# Altium PCB AU0004A.PcbDoc
Units mil, origin at the board's own origin, x right, y up, seen from the top; angles counter-clockwise.
Board outline 1033.51 x 1302.59 mil, 2 copper layers (Top Layer, Bottom Layer), stack 61.7 mil thick; 4 components, 4 nets, 15 pads, 3 vias.
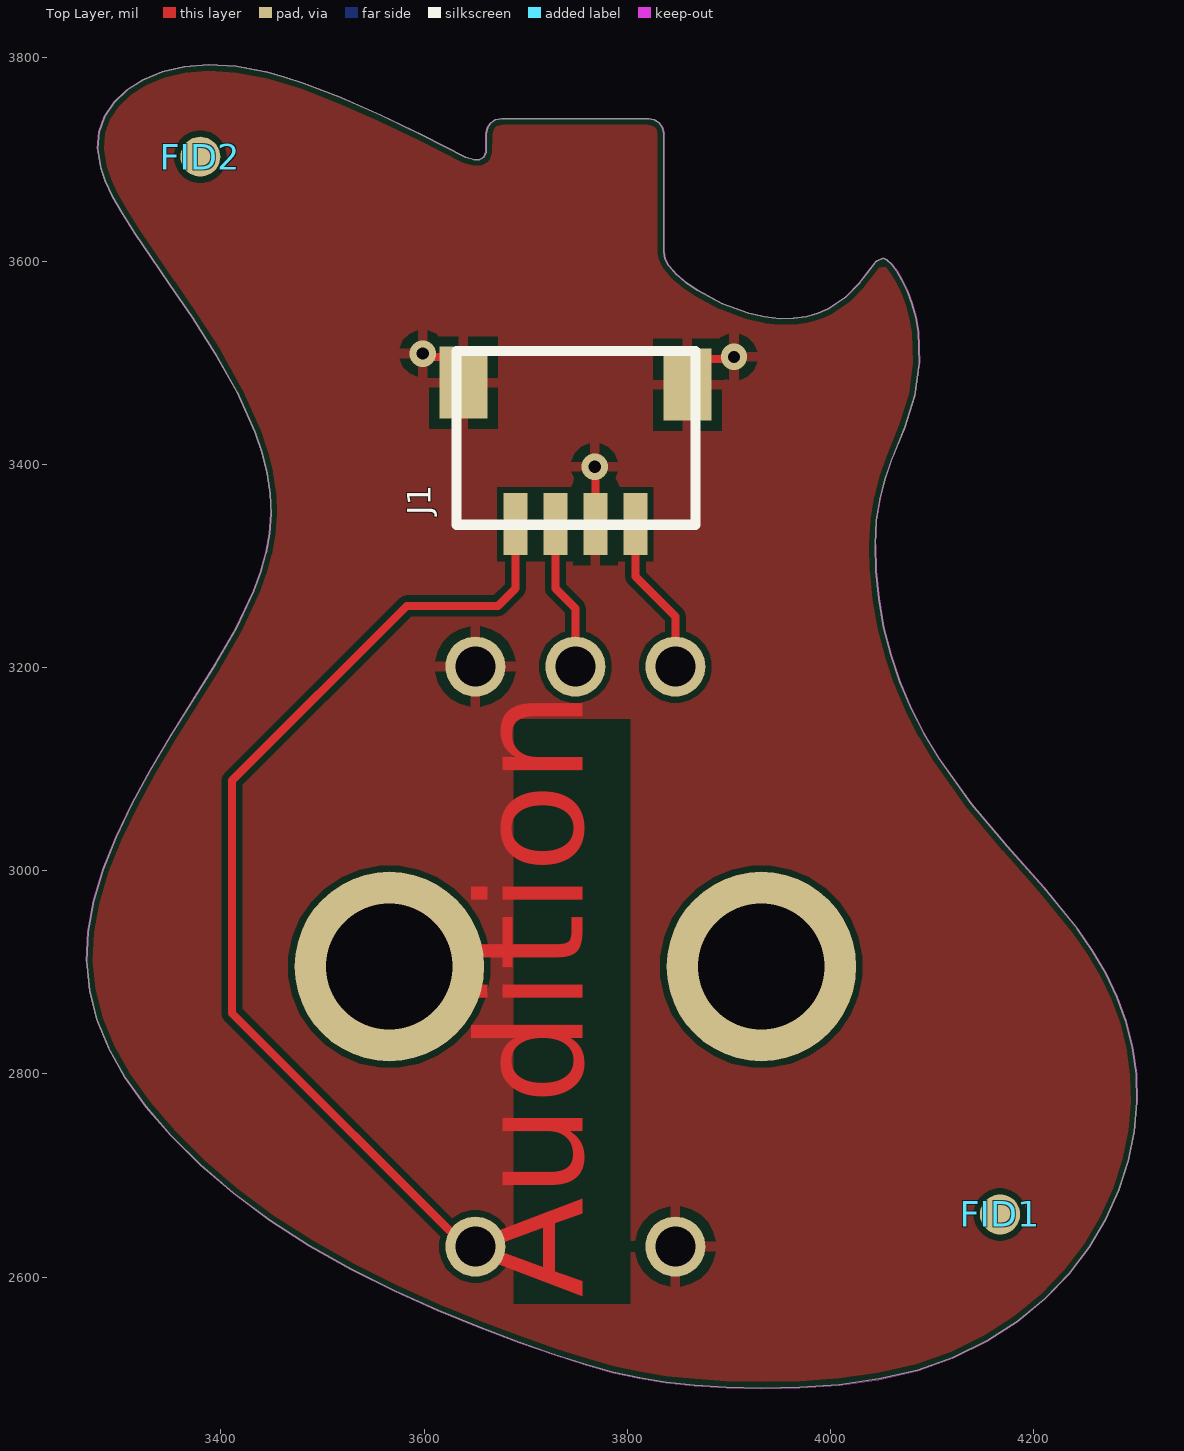
[diagram p0: Top Layer view]
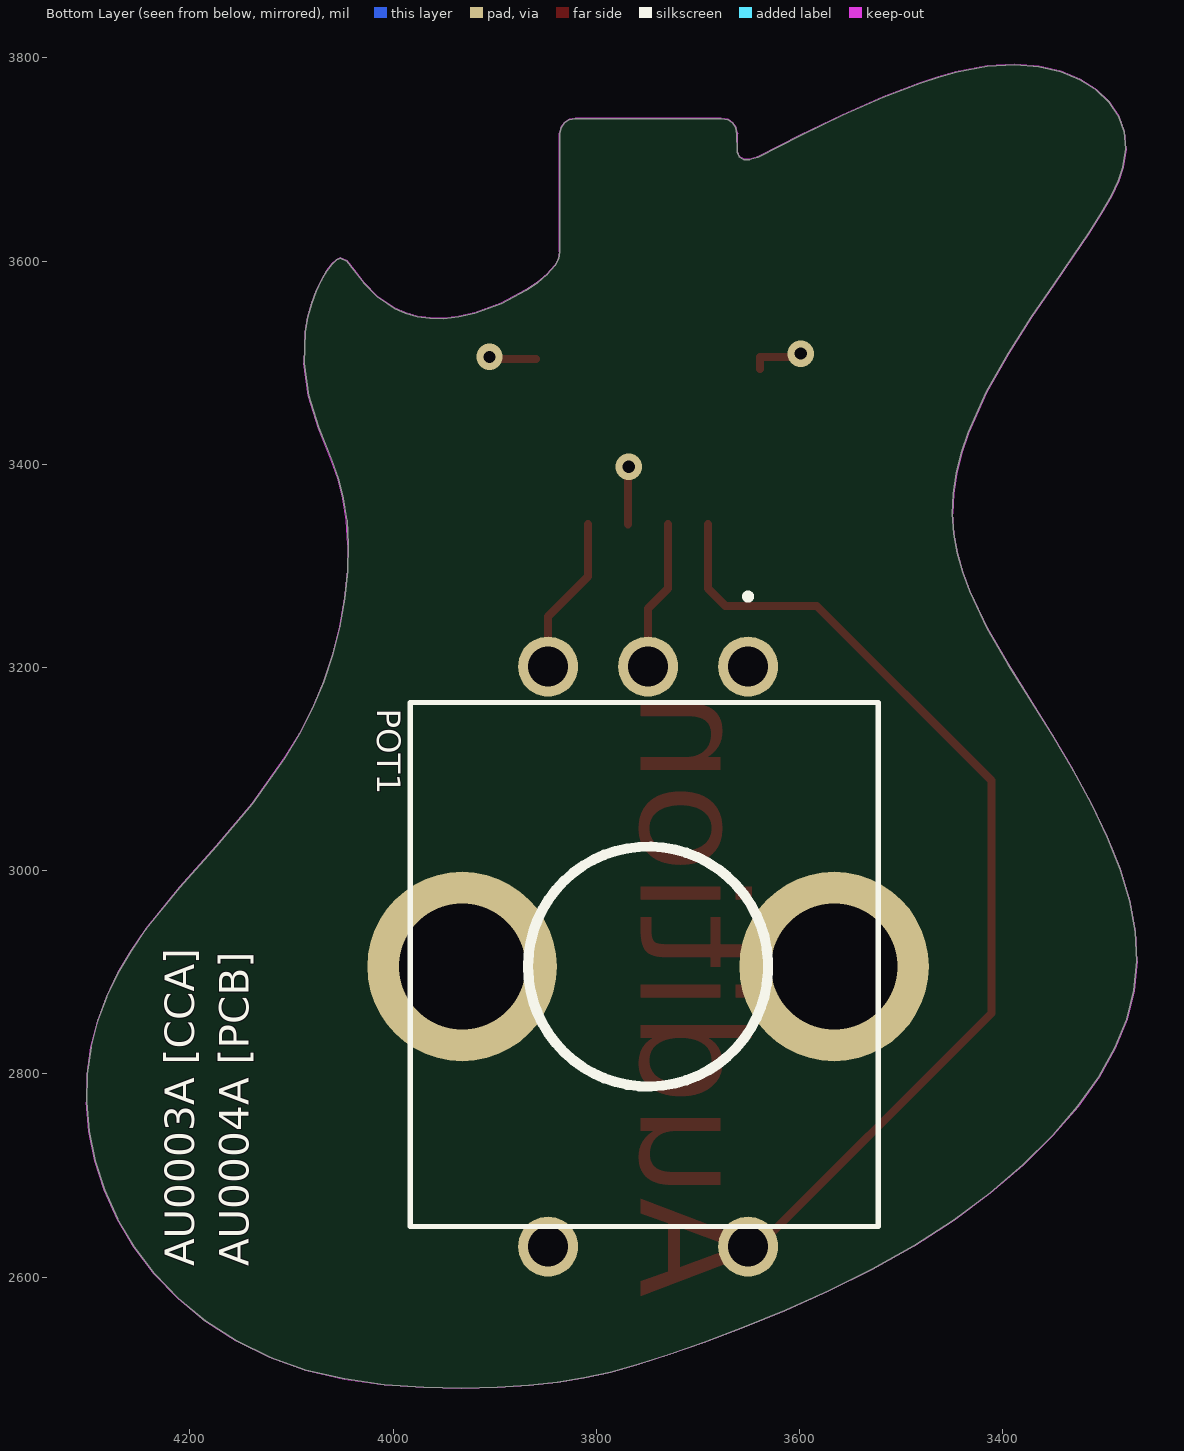
[diagram p1: Bottom Layer view, seen from below]

## Layer stack, top to bottom
Top Solder: solder mask 0.4, Solder Resist, Dk 3.5
Top Layer: signal copper 1.4
Dielectric 1: dielectric 58.9, FR-4, Dk 4.8
Bottom Layer: signal copper 1.4
Bottom Solder: solder mask 0.4, Solder Resist, Dk 3.5

## Board outline
3277.97,2853.79 3270.83,2882.12 3267.99,2910.76 3269.35,2939.97 3274.8,2970.01 3284.13,3001.02 3296.88,3032.92 3312.59,3065.63 3330.76,3099.04 3350.92,3133.07 3394.59,3202.71 3394.61,3202.74 3415.16,3238.47 3415.18,3238.51 3432.41,3275.04 3432.43,3275.09 3439.21,3293.68 3439.22,3293.73 3444.47,3312.58 3444.48,3312.63 3447.97,3331.73 3447.98,3331.79 3449.47,3351.19 3449.47,3351.25 3448.73,3370.93 3448.72,3370.99 3445.7,3390.95 3445.69,3391 3440.62,3411.09 3440.61,3411.13 3433.79,3431.24 3433.77,3431.29 3415.99,3471 3415.96,3471.05 3394.55,3509.24 3394.53,3509.27 3371.75,3544.88 3371.74,3544.9 3349.85,3576.89 3349.84,3576.9 3330.89,3604.38 3315.3,3627.59 3302.84,3647.26 3293.26,3664.11 3286.32,3678.86 3281.77,3692.25 3278.98,3710.42 3280.44,3727.18 3285.89,3742.48 3295.09,3756.24 3307.81,3768.36 3323.75,3778.49 3342.62,3786.28 3364.15,3791.34 3388.18,3793.29 3415.24,3791.61 3446.02,3785.78 3462.99,3781.13 3481.15,3775.25 3517.51,3761.25 3557,3743.8 3598.54,3723.85 3641.01,3702.33 3641.11,3702.29 3649,3699.97 3649.16,3699.95 3655.03,3699.99 3659.36,3702.72 3661.17,3707.47 3661.21,3707.66 3661.47,3725.14 3662.64,3731.42 3665.82,3735.98 3670.5,3739.03 3677.06,3740.15 3820.86,3740.16 3826.6,3739.05 3831.33,3736.01 3834.54,3731.44 3835.73,3725.7 3835.72,3609.39 3835.74,3609.28 3837.11,3602.29 3837.16,3602.14 3840.49,3595.87 3840.56,3595.77 3848.35,3586.85 3848.41,3586.78 3857.91,3578.79 3857.95,3578.76 3868.9,3571.23 3868.96,3571.2 3893.51,3558.17 3893.58,3558.14 3919.6,3548.63 3919.67,3548.61 3935.3,3545.08 3935.37,3545.07 3949.98,3543.44 3950.05,3543.44 3963.63,3543.56 3963.69,3543.57 3976.19,3545.28 3976.27,3545.3 3987.66,3548.45 3987.73,3548.48 3998,3552.91 3998.09,3552.96 4015.32,3564.7 4015.4,3564.76 4028.61,3578.21 4028.65,3578.26 4038.33,3590.88 4045.43,3599.94 4051.89,3602.74 4055.52,3601.13 4060.02,3596.92 4065.1,3590.21 4070.37,3581.32 4075.48,3570.57 4080.06,3558.28 4083.76,3544.75 4086.26,3530.3 4087.36,3499.48 4083.01,3467.61 4073.1,3436.25 4060.1,3403.99 4060.09,3403.97 4053.93,3386.26 4053.92,3386.22 4048.8,3366.78 4048.78,3366.73 4045.31,3345.05 4045.3,3344.99 4043.89,3320.93 4043.88,3320.88 4044.56,3295.01 4044.56,3294.96 4047.33,3267.89 4047.34,3267.85 4052.2,3240.2 4052.21,3240.16 4059.17,3212.59 4059.18,3212.54 4068.23,3185.65 4068.25,3185.6 4079.28,3159.71 4079.3,3159.67 4092.08,3134.76 4092.1,3134.74 4106.4,3110.79 4106.43,3110.75 4138.63,3065.61 4138.67,3065.57 4174.01,3023.72 4174.03,3023.7 4209.83,2983.43 4243.08,2942.5 4257.82,2921.11 4270.88,2898.87 4281.99,2875.7 4290.88,2851.51 4297.27,2826.21 4300.9,2799.72 4301.5,2772.04 4298.95,2743.51 4293.12,2714.56 4283.89,2685.63 4271.14,2657.15 4254.76,2629.56 4234.71,2603.3 4211.16,2578.84 4184.28,2556.66 4154.26,2537.22 4121.3,2521 4085.59,2508.48 4047.7,2499.71 4008.77,2494.19 3969.98,2491.36 3932.51,2490.69 3897.55,2491.62 3866.2,2493.61 3838.2,2496.58 3811.98,2500.79 3785.98,2506.54 3758.62,2514.12 3728.32,2523.83 3693.68,2535.93 3655.07,2550.46 3613.79,2567.31 3571.17,2586.4 3528.52,2607.62 3487.15,2630.89 3448.26,2656.05 3412.39,2682.79 3379.85,2710.67 3350.98,2739.28 3326.09,2768.21 3305.52,2797.05 3289.5,2825.52

## Design rules (kind name [scope] priority, off if disabled: settings)
Clearance [All] p1: gap=6 ignorepadtopadclearanceinfootprint=FALSE
Height [All] p1: minheight=0 maxheight=3000 prefheight=500
PolygonConnect [All] p1: connectstyle=Relief reliefconductorwidth=10 reliefentries=4 polygonreliefangle="90 Angle" airgapwidth=10
RoutingVias [All] p1: holewidth=12 width=26 viastyle="Through Hole" minholewidth=10 minwidth=20 maxholewidth=50 maxwidth=50
SolderMaskExpansion [All] p1: expansion=4 istentingtop=FALSE
Width [All] p1: maxlimit=100 minlimit=6 preferedwidth=6
29 further rules are at their usual default settings.

## Components (designator, comment, footprint, x,y, rotation, side; value= is the part's Value field where it differs from the comment)
FID1 "PCB Fiducial" "Fiducial 1mm - 2mm" 4166.96,2661.67 r0 top
FID2 "PCB Fiducial" "Fiducial 1mm - 2mm" 3379.85,3702.72 r0 top
J1 "SM04B-SRSS-TB(LF)(SN)" SM04B-SRSS-TB(LF)(SN) 3748.96,3410.67 r180 top (schematic designator J2)
POT1 "PRS11R-425F-S103B1" PRS11R425FS103B1 3748.96,2905.67 r0 bottom

## Footprints (in the part's own frame and the unit in brackets; to place one, negate y for a bottom-side part, rotate by r counter-clockwise, add the part's x,y. Pads: shape width x height; smd on the part's side, far side on the other; paste and mask are expansions set on the pad)
"Fiducial 1mm - 2mm" [mm] "1mm Pad 2mm Opening"
  round 1 smd paste-10 mask+0.5: 1(0,0)
PRS11R425FS103B1 [mm]
  round 1.5 hole 1: 1(-2.5,-7.5) 2(0,-7.5) 3(2.5,-7.5) 4(-2.5,7) 5(2.5,7)
  round 4.74 hole 3.16: MH1(-4.65,0) MH2(4.65,0)
  silkscreen extent -5.75,-9.3 5.95,6.49, body extent -5.75,-6.61 5.95,6.49, height 31.8
SM04B-SRSS-TB(LF)(SN) [mm] "CONN HEADR SH 4POS SIDE 1MM TIN"
  rect 0.6x1.55 smd: 1(-1.5,1.769) 2(-0.5,1.769) 3(0.5,1.769) 4(1.5,1.769)
  rect 1.2x1.8 smd: M1(2.8,-1.769) M2(-2.8,-1.719)
  silkscreen extent -3,-2.56 2.97,1.78, body extent -3,-2.65 3,2.3, height 2.91

## Part data
FID1 FID2: library part Fiducial
J1: "Conn Shrouded Header HDR 4 POS 1mm Solder RA SMD T/R", Colour=Natural, Contact Resistance=40mR, Housing Colour=Beige, Manufacturer=JST, Max Current Rating=1A, Max Operating Temperature=85°C, Max Voltage Rating (AC)=50V, Min Operating Temperature=-25°C, Supplier Part Number 1=455-1804-1-ND, ComponentLink1Description=https://datasheet.ciiva.com/26894/getdatasheetpartid-499363-26894945.pdf, ComponentLink1URL=https://datasheet.ciiva.com/26894/getdatasheetpartid-499363-26894945.pdf, ComponentLink2Description=https://datasheet.ciiva.com/26894/getdatasheetpartid-640736-26894676.pdf, ComponentLink2URL=https://datasheet.ciiva.com/26894/getdatasheetpartid-640736-26894676.pdf, ComponentLink3Description=https://datasheet.ciiva.com/16487/jstsm04b-srss-tb-lf-sn-16487222.pdf, ComponentLink3URL=https://datasheet.ciiva.com/16487/jstsm04b-srss-tb-lf-sn-16487222.pdf, Connector Type="Male Pin", Contact Material="Copper Alloy", Contact Plating=Copper,Tin, Depth=4.95mm, Housing Material=Polyamide, Lead Free="Lead Free", Length=6mm, Manufacturer Part Number=SM04B-SRSS-TB(LF)(SN), Max Voltage Rating (DC)=50V, Mount="Surface Mount", Number of Contacts=4, Number of Positions=4, Number of Rows=1, Orientation="Right Angle", Packaging="Tape and Reel", Pitch=0.039inch, Pricing 1="1=0.61, 10=0.569, 100=0.436, 500=0.37914, 1000=0.31279 (USD)", Stock 1=43886, Supplier 1=Digi-Key, Termination=Solder
POT1: "10k Pot w/ Momentary Switch - 25mm Length", Manufacturer=Bourns, Supplier Part Number 1=652-PRS11R425FS103B1, Manufacturer Part Number=PRS11R-425F-S103B1, Pricing="1=3.76000, 10=3.30000, 50=3.30000, 100=2.70000, 1000=1.82000, 10000=1.70000 (USD)", RoHS=No, Stock 1=729, Supplier 1=Mouser

## Via types
v1: diameter 26, hole 12, Top Layer to Bottom Layer, tented both sides, 3 vias

## Nets (pads, with @x,y where several pads share a name; then routed paths per layer and width w, separated by ;. In a path a pad name is that pad's centre, name@x,y a point inside that pad or via, vN(x,y) a via of type N, cw(c..) or ccw(c..) an arc to the next point about the centre after c; other vN are vias at no path point)
+POT: J1.1 POT1.3 | length 166.4
  Top Layer w8: J1.1 3808.02,3289.61 3847.39,3250.24 POT1.3@3847.39,3190.94
GND: J1.2 J1.M1 J1.M2 POT1.1 POT1.5 | length 156.7
  Top Layer w8: v1(3598.76,3508.99) 3602.04,3505.71 3638.72,3505.71 J1.M1@3638.72,3493.9 ; v1(3767.96,3397.67) 3768.65,3396.98 J1.2 ; J1.M2@3859.2,3503.74 3903.09,3503.74 v1(3905.06,3505.71)
POT: J1.3 POT1.2 | length 158.2
  Top Layer w8: J1.3 3729.28,3277.71 3748.96,3258.02 POT1.2@3748.96,3190.94
SW: J1.4 POT1.4 | length 988.5
  Top Layer w8: POT1.4@3650.54,2620.08 3410.96,2859.65 3410.96,3088.67 3582.96,3260.67 3672.96,3260.67 3689.91,3277.61 J1.4
pads on no net: FID1.1 FID2.1 POT1.MH1 POT1.MH2

## Polygon pours and split planes (outlines as drawn)
GND on Top Layer "GND_L01_P000" (solid, remove dead copper, pour order 0): 4909.25,4072.24 4909.25,2105.24 2730.25,2105.24 2730.25,4072.24

## Keep-outs
Keep-Out Layer:
  lines w1: 3660.96,3725.19 3660.95,3725.75 3660.96,3725.19 ; 3660.96,3725.19 3662.15,3731.62 3665.45,3736.36 3670.31,3739.52 3677.02,3740.67 3820.9,3740.67 3826.8,3739.54 3831.69,3736.38 3835.02,3731.64 3836.24,3725.75 3836.24,3609.39 3837.62,3602.38 3840.95,3596.11 3848.74,3587.18 3858.24,3579.18 3869.19,3571.65 3893.75,3558.62 3919.78,3549.12 3935.42,3545.58 3950.05,3543.95 3963.62,3544.08 3976.13,3545.8 3987.53,3548.95 3997.8,3553.39 4015.03,3565.12 4028.24,3578.57 4037.92,3591.2 4045.11,3600.36 4051.89,3603.3 4055.81,3601.56 4060.4,3597.26 4065.52,3590.49 4070.83,3581.56 4075.95,3570.77 4080.55,3558.44 4084.26,3544.87 4086.78,3530.36 4087.87,3499.46 4083.52,3467.5 4073.59,3436.07 4060.58,3403.8 4054.42,3386.09 4049.29,3366.65 4045.82,3344.96 4044.4,3320.9 4045.08,3295.01 4047.85,3267.94 4052.71,3240.29 4059.67,3212.71 4068.72,3185.81 4079.75,3159.91 4092.54,3135 4106.84,3111.05 4139.06,3065.9 4174.41,3024.04 4210.22,2983.76 4243.49,2942.81 4258.25,2921.39 4271.33,2899.11 4282.47,2875.9 4291.37,2851.66 4297.78,2826.31 4301.41,2799.76 4302.02,2772.02 4299.46,2743.43 4293.62,2714.43 4284.37,2685.44 4271.6,2656.92 4255.19,2629.27 4235.1,2602.97 4211.51,2578.46 4184.58,2556.24 4154.52,2536.77 4121.5,2520.53 4085.73,2507.98 4047.8,2499.2 4008.82,2493.67 3970,2490.85 3932.51,2490.18 3897.53,2491.1 3866.16,2493.1 3838.13,2496.07 3811.88,2500.28 3785.86,2506.04 3758.47,2513.63 3728.15,2523.34 3693.5,2535.45 3654.88,2549.98 3613.59,2566.84 3570.95,2585.93 3528.28,2607.17 3486.89,2630.44 3447.97,2655.63 3412.07,2682.38 3379.5,2710.29 3350.6,2738.93 3325.69,2767.9 3305.09,2796.78 3289.03,2825.3 3277.48,2853.63 3270.32,2882.03 3267.48,2910.75 3268.83,2940.03 3274.3,2970.13 3283.64,3001.19 3296.41,3033.13 3312.13,3065.86 3330.31,3099.3 3350.48,3133.34 3394.16,3202.99 3414.71,3238.73 3431.94,3275.26 3438.72,3293.87 3443.98,3312.72 3447.46,3331.83 3448.95,3351.22 3448.22,3370.92 3445.19,3390.87 3440.12,3410.97 3433.3,3431.07 3415.51,3470.79 3394.1,3508.99 3371.31,3544.61 3349.42,3576.6 3330.46,3604.09 3314.87,3627.31 3302.4,3646.99 3292.8,3663.87 3285.84,3678.67 3281.27,3692.12 3278.46,3710.4 3279.93,3727.29 3285.43,3742.71 3294.7,3756.58 3307.49,3768.76 3323.51,3778.95 3342.47,3786.77 3364.07,3791.85 3388.18,3793.8 3415.31,3792.12 3446.13,3786.28 3463.14,3781.63 3481.32,3775.74 3517.7,3761.73 3557.22,3744.27 3598.76,3724.31 3641.25,3702.79 3649.15,3700.47 3655.03,3700.5 3658.88,3702.9 3660.69,3707.66 3660.96,3725.19

## Other copper
Top Layer:
  text "Audition" at 3790.71,2579.54 h180 r90

## Silkscreen, mask and mechanical layers (free items; w line width, h text height)
Bottom Overlay:
  text "AU0004A [PCB]" at 4131.96,2610.67 h50 r270
  text "AU0003A [CCA]" at 4185.96,2610.67 h50 r270
Top Solder:
  drawing of 200 lines, arcs and shapes, not listed
  text "Audition" at 3790.71,2578.72 h180 r90